# EAGLE board arduino_Uno_RevG-MU (EAGLE 9.4.2)
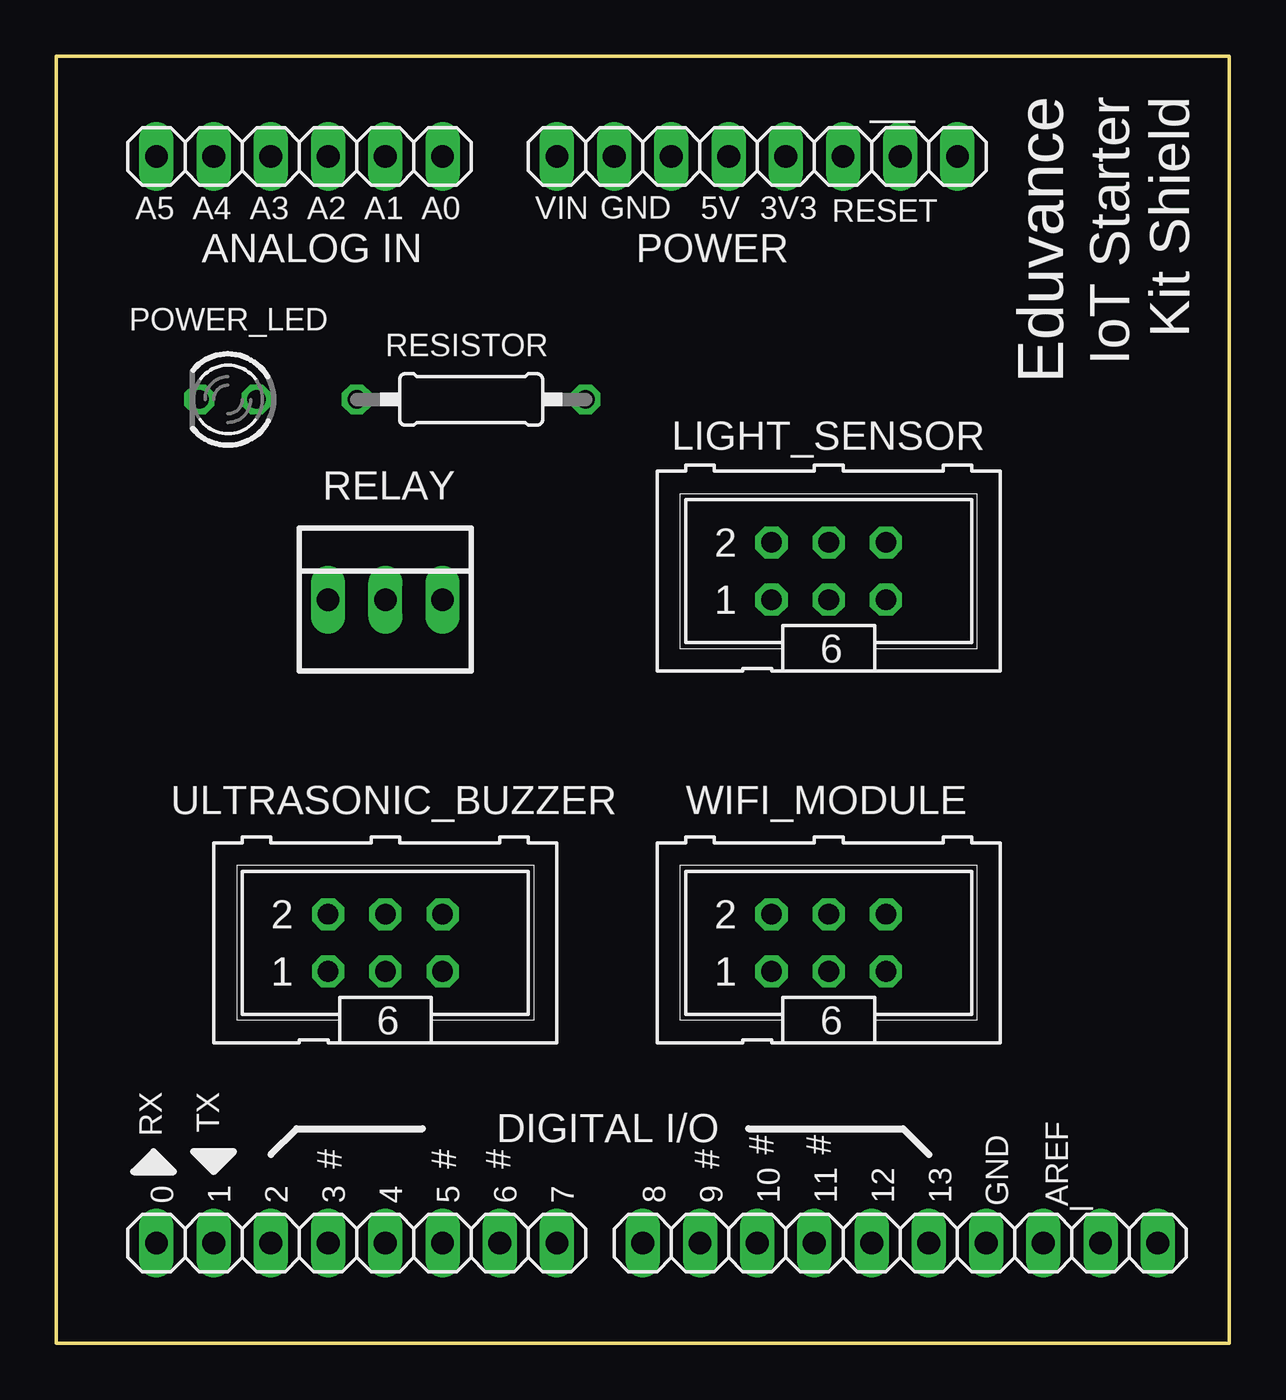
[diagram p0: board, top side]
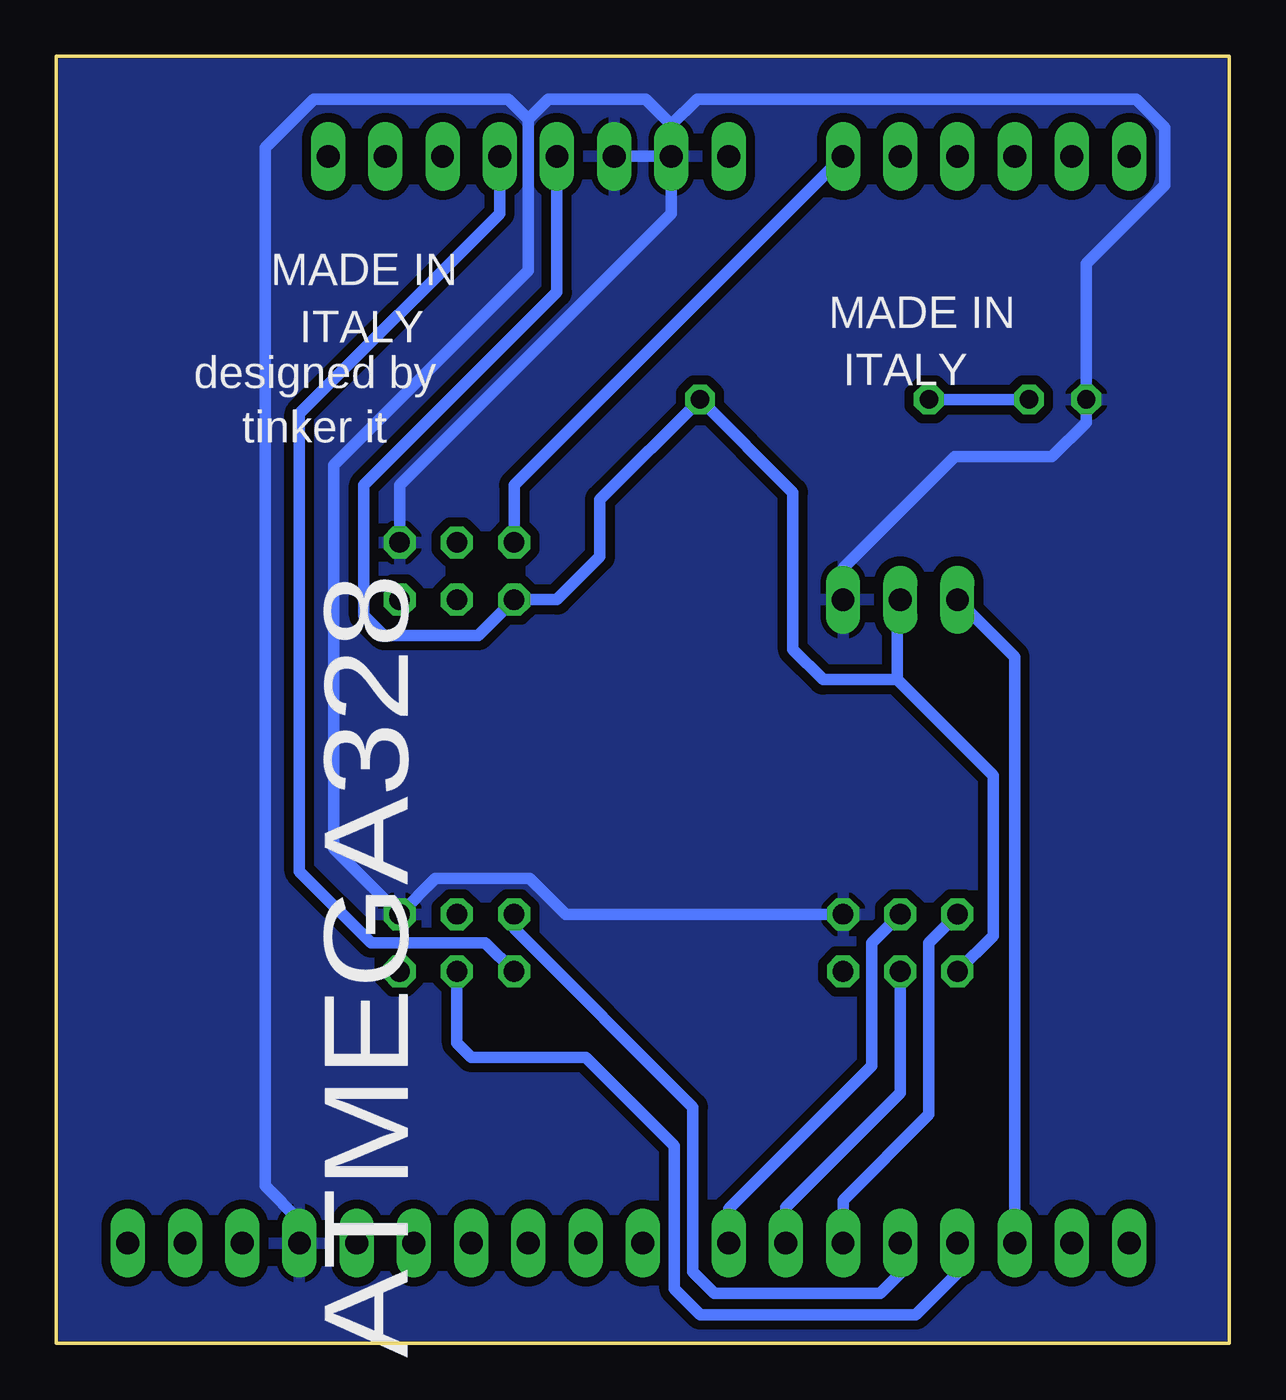
[diagram p1: board, bottom side, seen from below]

Size 52.07 x 57.15 mm. Coordinates in mm from the lower left corner, seen from the top.
Outline: 0,57.15 0,0 52.07,0 52.07,57.15 0,57.15
Copper layers (1*16): Top 0.035mm / dielectric 1.5mm / Bottom 0.035mm
Design rules "default *": minimum track width 20mil, minimum drill 0.35mm, track to track 16mil, track to pad 16mil, pad to pad 16mil, via to via 16mil, smd to smd 16mil, copper to edge 1mil, drill to drill 6mil, minimum pad ring 10mil, minimum via ring 8mil, stop-mask expansion 4mil, vias tented up to drill 0mil, thermal gap 10mil
Net classes: 0 default: width 0.152 mm, clearance 0.152 mm; 1 power: width 0.406 mm, drill 0.61 mm, clearance 0.152 mm; 2 gnd: width 0.203 mm, drill 0.559 mm, clearance 0.152 mm; 3 usbvcc: width 0.203 mm, drill 0.61 mm, clearance 0.152 mm; 4 aref: width 0.203 mm, drill 0.61 mm, clearance 0.152 mm
vRestrict: area -24.1,44.1 to -22.4,49.1; area -21.6,45.5 to -19.9,49.1; area -18.5,45.3 to -17.4,48.8; area -16,45.3 to -14.9,48.8; area -13.5,45.3 to -12.3,48.8; area -10.9,45.3 to -9.8,48.8; area -8.3,47.2 to -7.1,48.8; area -6.7,45.1 to 0.6,46.9; area 13.3,44.2 to 14.7,46.7; area 15.9,44.2 to 17.3,46.7; area 14.4,35.8 to 17.8,37.2; area -46.4,21.8 to -45,30.1; 14 more areas

## Footprints (pad centres in the part's own frame; a part is rotated, then mirrored left to right if it is on the bottom)
1X02 = drill 1.016 long: 1 -1.27,0; 2 1.27,0
1X06 = drill 1.016 long: 1 -6.35,0; 2 -3.81,0; 3 -1.27,0; 4 1.27,0; 5 3.81,0; 6 6.35,0
1X08 = drill 1.016 long: 1 -8.89,0; 2 -6.35,0; 3 -3.81,0; 4 -1.27,0; 5 1.27,0; 6 3.81,0; 7 6.35,0; 8 8.89,0
ML6 = drill 0.914 octagon: 1 -2.54,-1.27; 2 -2.54,1.27; 3 0,-1.27; 4 0,1.27; 5 2.54,-1.27; 6 2.54,1.27
LED3MM = drill 0.813 octagon: A -1.27,0; K 1.27,0
22-23-2031 = drill 1 long: 1 -2.54,0; 2 0,0; 3 2.54,0
0207/10 = drill 0.813 octagon: 1 -5.08,0; 2 5.08,0

## Placement (x,y rotation side)
_  [1X02]  47.62,4.45 0 top
__  [1X02]  38.73,52.7 0 top
AD  [1X06]  10.79,52.7 180 top
IOH  [1X08]  34.93,4.45 0 top
IOL  [1X08]  13.34,4.45 0 top
LIGHT_SENSOR  [ML6]  34.29,34.29 0 top
POWER  [1X06]  28.57,52.7 180 top
POWER_LED  [LED3MM]  7.62,41.91 180 top
RELAY  22-23-2031  [22-23-2031]  14.6,33.02 0 top
RESISTOR  330E  [0207/10]  18.41,41.91 180 top
ULTRASONIC_BUZZER  [ML6]  14.6,17.78 0 top
WIFI_MODULE  [ML6]  34.29,17.78 0 top

## Library data of the parts
_ __ AD IOH IOL POWER = pinhead
LIGHT_SENSOR ULTRASONIC_BUZZER WIFI_MODULE = con-harting-ml; OC_FARNELL: unknown; OC_NEWARK: unknown
POWER_LED = led
RELAY = con-molex; MF: MOLEX; MPN: 22-23-2031; OC_FARNELL: 1462950; OC_NEWARK: 30C0862
RESISTOR = rcl; SPICEPREFIX: R

## Nets
GND: IOH.7 LIGHT_SENSOR.6 POWER.4 POWER.5 POWER_LED.K RELAY.3 ULTRASONIC_BUZZER.6 WIFI_MODULE.6
N$1: LIGHT_SENSOR.1 POWER.3 RELAY.2 RESISTOR.1 ULTRASONIC_BUZZER.1
N$3: AD.1 LIGHT_SENSOR.2
N$4: IOL.6 ULTRASONIC_BUZZER.2
N$5: IOL.7 ULTRASONIC_BUZZER.3
N$6: IOL.8 ULTRASONIC_BUZZER.4
N$7: POWER.2 WIFI_MODULE.1
N$8: IOL.4 WIFI_MODULE.3
N$9: IOL.5 WIFI_MODULE.2
N$10: POWER_LED.A RESISTOR.2
N$11: IOL.3 RELAY.1

## Tracks (layer width: path | path; a pad name or v marks a point on that pad's centre or on a via)
GND
  Bottom 0.508: ULTRASONIC_BUZZER.6 29.46,19.05 31.05,20.64 35.24,20.64 WIFI_MODULE.6 39.75,21.97 39.75,38.99 31.12,47.62 31.12,54.36 | LIGHT_SENSOR.6 36.83,38.1 24.76,50.16 POWER.5 | POWER.5 24.76,53.02 | POWER.5 POWER.4 | IOH.7 41.27,5.46 42.8,6.99 42.8,53.09 40.64,55.24 32,55.24 31.12,54.36 | 24.76,54.1 23.62,55.24 4.13,55.24 2.86,53.98 2.86,51.44 6.35,47.94 POWER_LED.K 6.35,40.89 7.87,39.37 12.19,39.37 17.15,34.42 RELAY.3 | POWER.5 24.76,54.1 | 24.76,54.1 25.91,55.24 30.23,55.24 31.12,54.36
  pour Bottom: -1.27,58.42 53.47,58.42 53.47,-1.27 -1.27,-1.27
N$1
  Bottom 0.508: POWER.3 29.84,46.67 38.42,38.1 38.42,32.32 37.53,31.43 33.34,31.43 LIGHT_SENSOR.1 29.84,33.02 27.94,34.92 27.94,37.47 RESISTOR.1 19.37,37.78 19.37,30.8 18.03,29.46 14.73,29.46 | ULTRASONIC_BUZZER.1 10.48,18.1 10.48,25.21 14.73,29.46 | 14.73,29.46 14.73,32.89 RELAY.2
N$3
  Bottom 0.508: LIGHT_SENSOR.2 31.75,38.1 AD.1
N$4
  Bottom 0.508: IOL.6 17.15,6.35 13.34,10.16 13.34,17.78 ULTRASONIC_BUZZER.2
N$5
  Bottom 0.508: ULTRASONIC_BUZZER.3 14.6,11.11 19.68,6.03 IOL.7
N$6
  Bottom 0.508: ULTRASONIC_BUZZER.4 15.88,17.78 15.88,12.32 22.23,5.97 IOL.8
N$7
  Bottom 0.508: WIFI_MODULE.1 33.02,17.78 38.1,17.78 41.27,20.95 41.27,41.27 32.38,50.16 POWER.2
N$8
  Bottom 0.508: WIFI_MODULE.3 34.29,13.34 33.65,12.7 28.57,12.7 24.64,8.76 24.64,2.41 23.49,1.27 13.91,1.27 12.06,3.11 IOL.4
N$9
  Bottom 0.508: WIFI_MODULE.2 31.75,18.41 23.81,10.48 23.81,3.17 22.86,2.22 15.49,2.22 14.6,3.11 IOL.5
N$10
  Bottom 0.508: RESISTOR.2 POWER_LED.A
N$11
  Bottom 0.508: RELAY.1 9.52,30.48 IOL.3

## Text on the board
tPlace: 0 | 1 | 2 | 3 | 4 | 5 | 6 | 7 | 8 | 9 | 10 | 11 | 12 | 13
tNames: Eduvance | IoT Starter / Kit Shield | A5 | A4 | A3 | A2 | A1 | A0 | VIN | GND | 5V | 3V3 | RESET | ANALOG IN | RX | TX | DIGITAL I/O | # | # | # | # | # | # | GND | AREF
bNames: MADE IN | designed by | MADE IN | ITALY | tinker it | ITALY | designed by | tinker it | ATMEGA328
ReferenceLC: L | TX | RX | PC1 | PC2
214bmp: D:/SmartProjects/Snc/a4_bn_logo2.bmp